# Altium PCB PCB1.PcbDoc
Units mm, origin at the board's own origin, x right, y up, seen from the top; angles counter-clockwise.
Board outline 35.2 x 15.75 mm, 4 copper layers (Top Layer, Layer 1, Layer 2, Bottom Layer), stack 0.603 mm thick; 36 components, 33 nets, 157 pads, 182 vias.
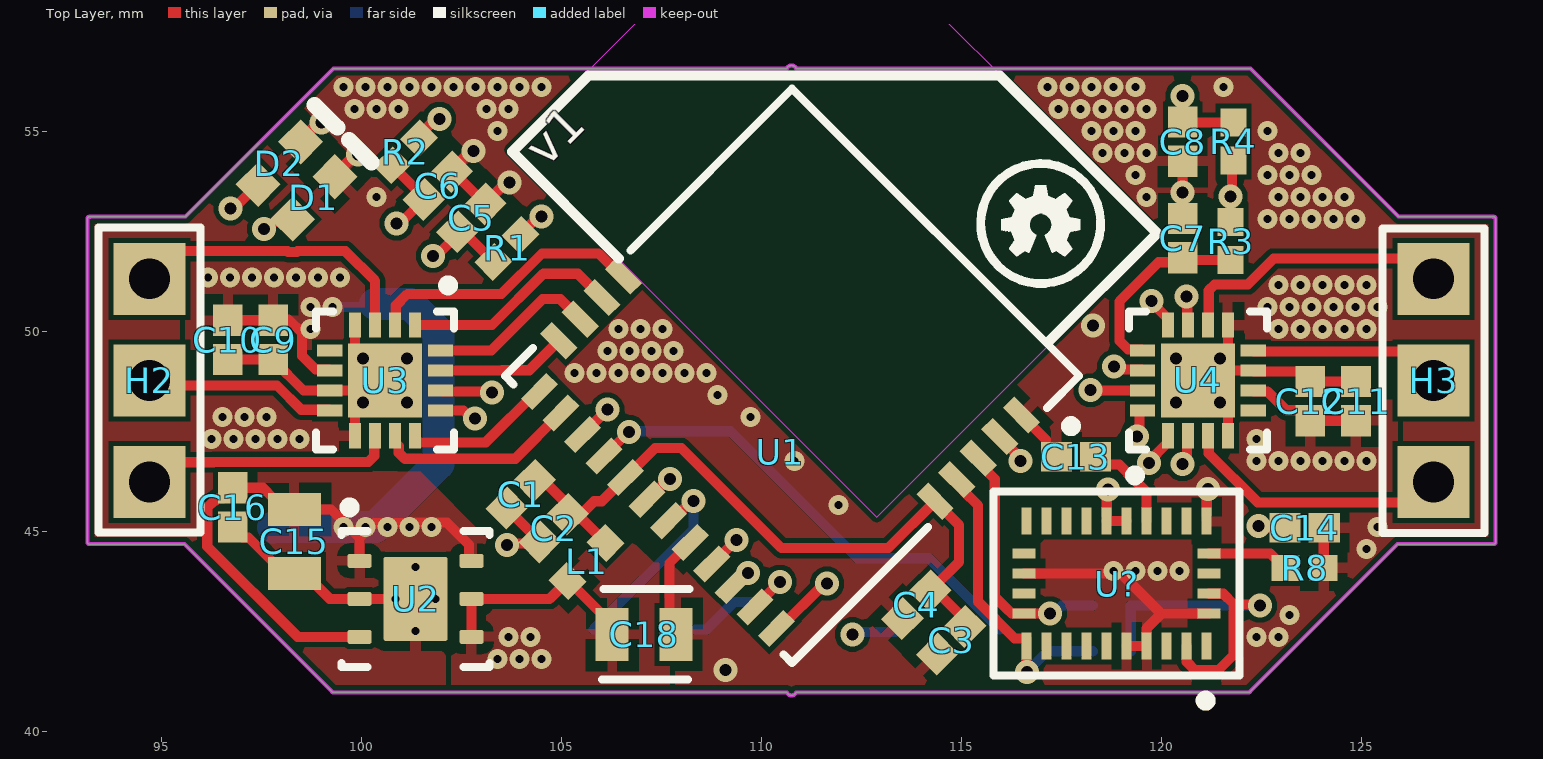
[diagram p0: Top Layer view]
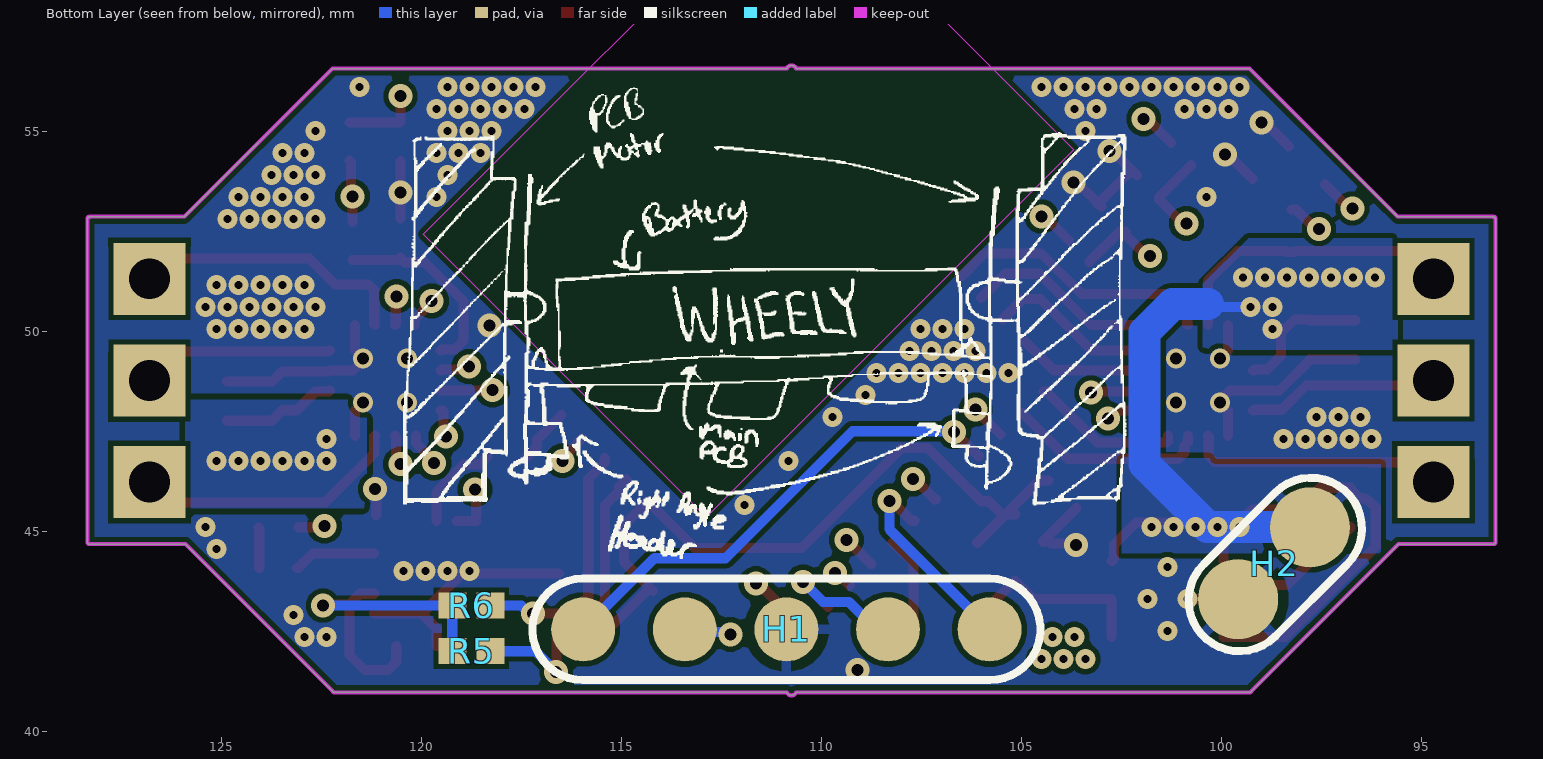
[diagram p1: Bottom Layer view, seen from below]
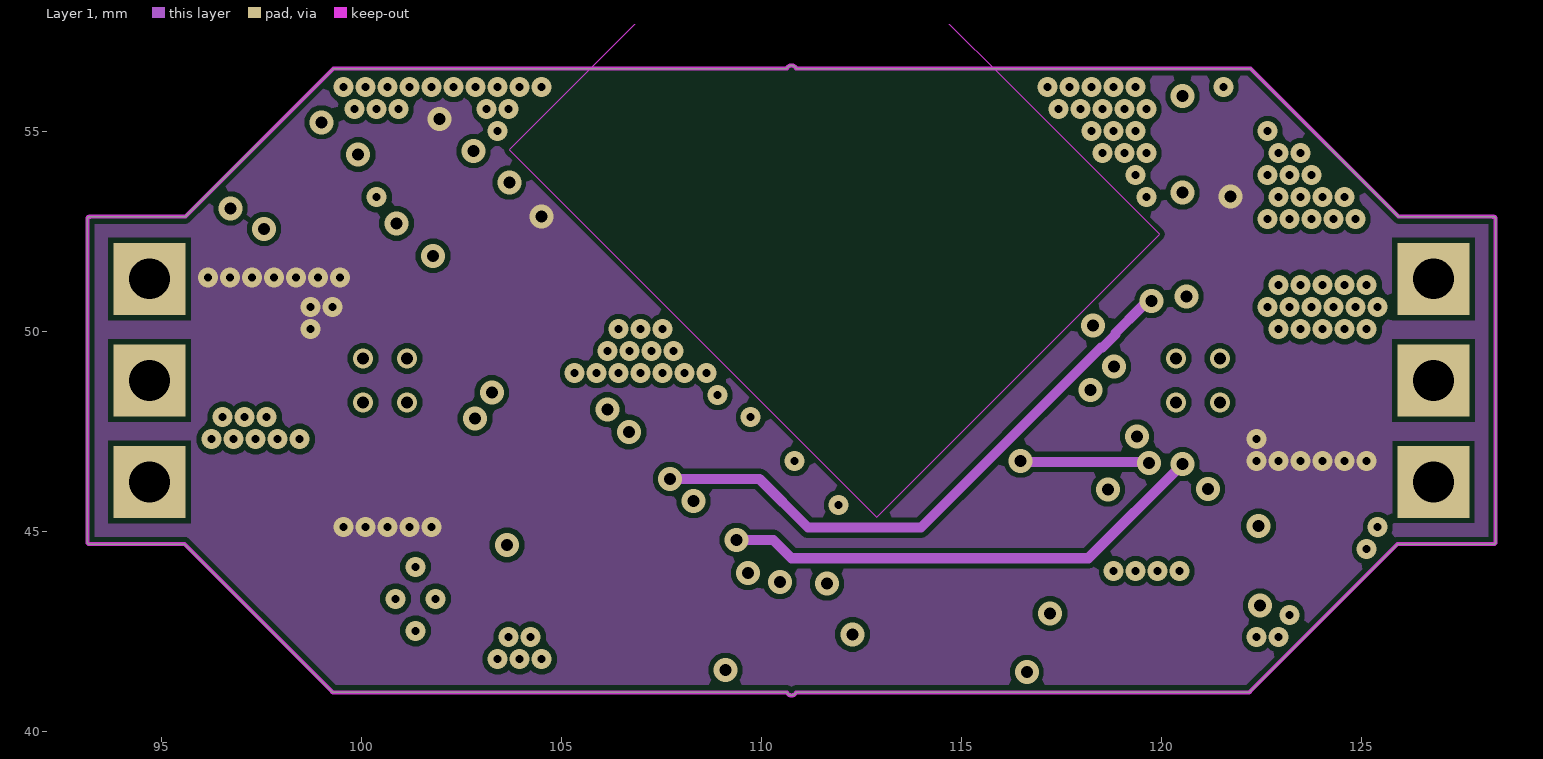
[diagram p2: Layer 1]
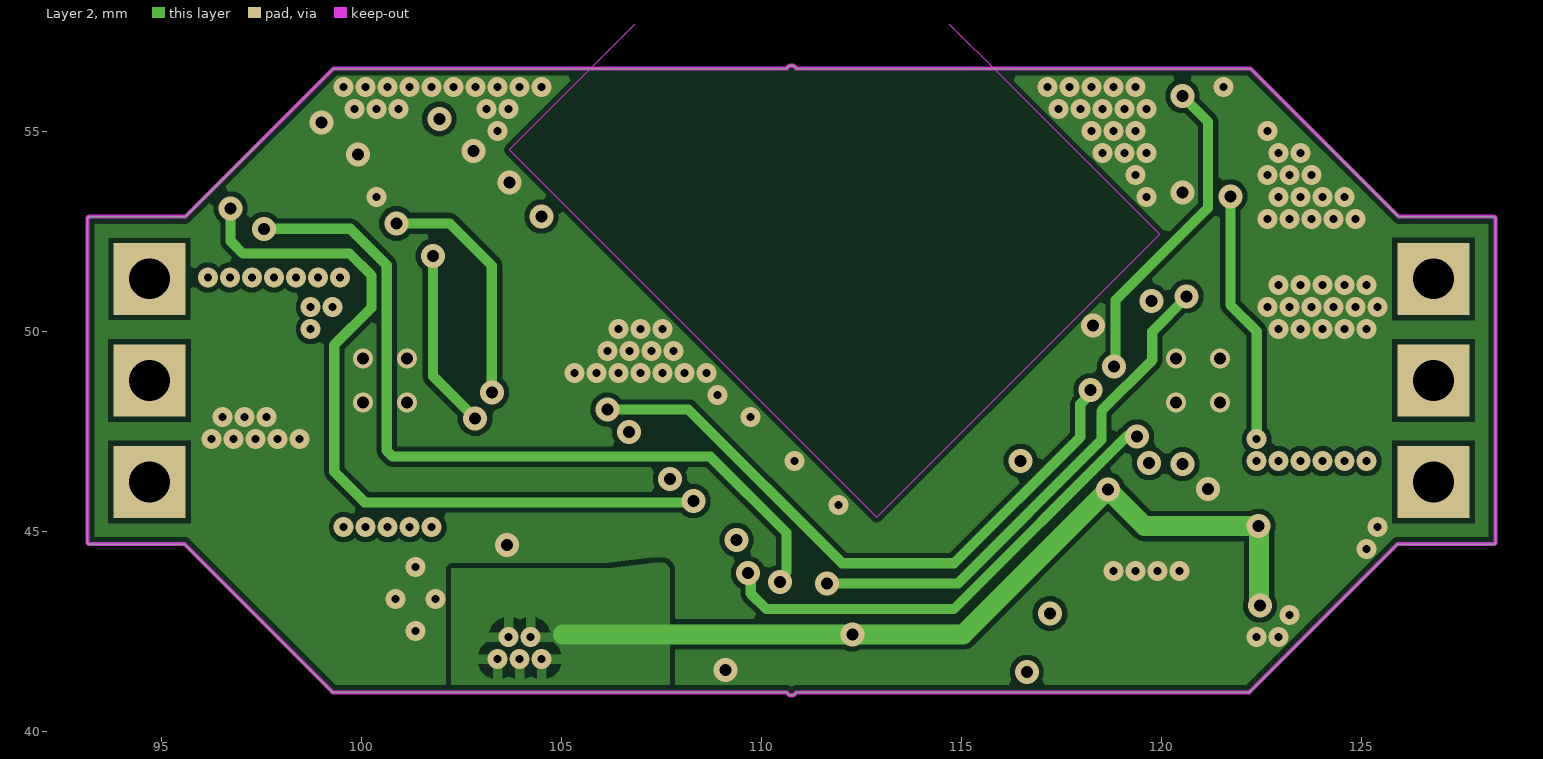
[diagram p3: Layer 2]

## Layer stack, top to bottom
Top Solder: solder mask 0.0102, Solder Resist, Dk 3.5
Top Layer: signal copper 0.0356
Dielectric 1: prepreg 0.0711, PP-006, Dk 4.1
Layer 1: signal copper 0.035
Dielectrc3: dielectric 0.32, FR-4, Dk 4.8
Layer 2: signal copper 0.035
Dielectric 2: prepreg 0.0711, PP-006, Dk 4.1
Bottom Layer: signal copper 0.0356
Bottom Solder: solder mask 0.0102, Solder Resist, Dk 3.5

## Board outline
93.218,44.675 95.563,44.675 99.253,40.985 99.253,40.986 ccw(c99.289,41.021) 99.289,40.971 110.627,40.971 ccw(c110.744,41.021) 110.861,40.971 122.174,40.971 ccw(c122.174,41.021) 122.21,40.986 122.21,40.985 125.9,44.675 128.27,44.675 ccw(c128.27,44.726) 128.282,44.677 ccw(c128.295,44.726) 128.345,44.726 128.345,52.81 ccw(c128.295,52.81) 128.282,52.859 ccw(c128.27,52.81) 128.27,52.861 125.925,52.861 122.235,56.551 122.235,56.55 ccw(c122.199,56.515) 122.199,56.565 110.861,56.565 ccw(c110.744,56.515) 110.627,56.565 99.314,56.565 ccw(c99.314,56.515) 99.278,56.55 99.278,56.551 95.588,52.861 93.218,52.861 ccw(c93.218,52.81) 93.206,52.859 ccw(c93.193,52.81) 93.143,52.81 93.143,44.726 ccw(c93.193,44.726) 93.206,44.677 ccw(c93.218,44.726)

## Design rules (kind name [scope] priority, off if disabled: settings)
Clearance [All] p1: gap=0.13 ignorepadtopadclearanceinfootprint=FALSE
PolygonConnect [isvia vs InNet('VCC')] p1: connectstyle=Direct reliefconductorwidth=0.254 reliefentries=4 polygonreliefangle="90 Angle" airgapwidth=0.254
PolygonConnect PolygonConnect_3 [isvia vs InNet('GND')] p2: connectstyle=Direct reliefconductorwidth=0.254 reliefentries=4 polygonreliefangle="90 Angle" airgapwidth=0.254
PolygonConnect PolygonConnect_2 [All] p3: connectstyle=Relief reliefconductorwidth=0.254 reliefentries=4 polygonreliefangle="90 Angle" airgapwidth=0.254
RoutingVias [All] p1: holewidth=0.711 width=1.27 viastyle="Through Hole" minholewidth=0.3 minwidth=0.6 maxholewidth=0.711 maxwidth=1.27
SolderMaskExpansion [All] p1: expansion=0 istentingtop=FALSE
Width [All] p1: maxlimit=1 minlimit=0.13 preferedwidth=0.254
30 further rules are at their usual default settings.

## Components (designator, comment, footprint, x,y, rotation, side; value= is the part's Value field where it differs from the comment)
C1 "10nF" CAPC1005X56X25ML10T15 103.973,45.922 r45 top
C2 "100nF" CAPC1005X56X25ML10T15 104.798,45.077 r45 top
C3 "10nF" CAPC1005X56X25ML10T15 114.733,42.271 r45 top
C4 "100nF" CAPC1005X56X25ML10T15 113.862,43.16 r45 top
C5 "10nF" CAPC1005X56X25ML10T15 102.743,52.832 r225 top
C6 "10nF" CAPC1005X56X25ML10T15 101.904,53.641 r225 top
C7 "10nF" CAPC1005X56X25ML10T15 120.523,52.324 r270 top
C8 "10nF" CAPC1005X56X25ML10T15 120.523,54.737 r90 top
C9 "10nF" CAPC1005X56X25ML10T15 97.79,49.784 r90 top
C10 "100nF" CAPC1005X56X25ML10T15 96.647,49.784 r90 top
C11 "10nF" CAPC1005X56X25ML10T15 124.858,48.248 r270 top
C12 "100nF" CAPC1005X56X25ML10T15 123.715,48.248 r270 top
C13 "100nF" CAPC1005X56X25ML10T15 117.856,46.863 r180 top
C14 "100nF" CAPC1005X56X25ML10T15 123.571,45.085 r180 top
C15 "10uF" FP-CL21B106KOQNNNE-MFG 98.315,44.742 r90 top
C16 "10nF" CAPC1005X56X25ML10T15 96.774,45.593 r90 top
C18 "10uF" FP-CL21B106KOQNNNE-MFG 107.061,42.418 r180 top
D1 "HSMD-C190" AVAG-HSMX-C190_V 98.8,53.329 r45 top
D2 "HSMD-C190" AVAG-HSMX-C190_V 97.939,54.201 r45 top
H1 "H5P2.54" T5P2.54 115.951,42.545 r180 bottom
H2 "H2P2.54" T2P2.54 98.679,44.196 r315 bottom
H2 "H3P2.54" "H3P2.54 V" 95.09,64.094 r90 top
H3 "H3P2.54" "H3P2.54 V" 126.398,33.442 r270 top
L1 "BLM18AG331SN1D" MURA-BLM18-RF-H4-CHIP-2_V 105.622,44.232 r45 top
R1 "10k" RESC1005X40X25ML5T10 103.632,52.07 r45 top
R2 "10k" RESC1005X40X25ML5T10 101.092,54.483 r45 top
R3 "10k" RESC1005X40X25ML5T10 121.721,52.25 r90 top
R4 "10k" RESC1005X40X25ML5T10 121.793,54.737 r270 top
R5 "10k" RESC1005X40X25ML5T10 118.749,41.999 r0 bottom
R6 "10k" RESC1005X40X25ML5T10 118.749,43.142 r0 bottom
R8 "0" RESC1005X40X25ML5T10 123.573,44.082 r180 top
U1 "CYBLE-022001-00" FP-CYBLE-022001-00-MFG 110.759,48.883 r315 top
U2 "LP38693SD-3.3/NOPB" NGG0006A_V 101.346,43.307 r0 top
U3 "STSPIN230" QFN50P300X300X100_HS-17N 100.584,48.768 r270 top
U4 "STSPIN230" QFN50P300X300X100_HS-17N 120.904,48.768 r90 top
U? "BNO085" FP-BNO085-MFG 118.872,43.688 r270 top

## Footprints (in the part's own frame and the unit in brackets; to place one, negate y for a bottom-side part, rotate by r counter-clockwise, add the part's x,y. Pads: shape width x height; smd on the part's side, far side on the other; paste and mask are expansions set on the pad)
AVAG-HSMX-C190_V [mm] "SMD, 2-Leads, Body 1.6x0.8mm, Height 0.9mm"
  rect 0.8x0.8 smd: 1(-0.75,0) 2(0.75,0)
  silkscreen extent 1.65,-0.4 1.65,0.4, body extent -0.8,-0.4 0.8,0.4, height 0.9
CAPC1005X56X25ML10T15 [mm] "Chip Capacitor, 2-Leads, Body 1.00x0.50mm, IPC Low Density"
  rect 0.78x0.74 smd: 1(-0.49,0) 2(0.49,0)
  body extent -0.55,-0.3 0.55,0.3, height 0.56
FP-BNO085-MFG [mm]
  rect 0.675x0.25 smd paste+0 mask+0: 1(1.562,2.25) 6(-1.562,2.25) 7(-1.562,1.75) 8(-1.562,1.25) 9(-1.562,0.75) 10(-1.562,0.25) 11(-1.562,-0.25) 12(-1.562,-0.75) 13(-1.562,-1.25) 14(-1.562,-1.75) 15(-1.562,-2.25) 20(1.562,-2.25) 21(1.562,-1.75) 22(1.562,-1.25) 23(1.562,-0.75) 24(1.562,-0.25) 25(1.562,0.25) 26(1.562,0.75) 27(1.562,1.25) 28(1.562,1.75)
  rect 0.25x0.575 smd paste+0 mask+0: 2(0.75,2.312) 3(0.25,2.312) 4(-0.25,2.312) 5(-0.75,2.312) 16(-0.75,-2.312) 17(-0.25,-2.312) 18(0.25,-2.312) 19(0.75,-2.312)
  silkscreen extent -2.3,-3.08 3.05,3.08, body extent -2.45,-3.15 2.45,3.15, height 0.25
FP-CL21B106KOQNNNE-MFG [mm]
  rect 0.825x1.325 smd paste+0 mask+0: 1(-0.8,0) 2(0.8,0)
  body extent -1.31,-0.8 1.31,0.8, height 0.25
FP-CYBLE-022001-00-MFG [mm]
  rect 0.91x0.41 smd paste+0 mask+0: 1(4.745,3.36) 2(4.745,2.598) 3(4.745,1.836) 4(4.745,1.074) 5(4.745,0.312) 18(-4.745,-3.506) 19(-4.745,-2.744) 20(-4.745,-1.982) 21(-4.745,-1.22)
  rect 0.41x0.91 smd paste+0 mask+0: 6(4.19,-4.745) 7(3.428,-4.745) 8(2.666,-4.745) 9(1.904,-4.745) 10(1.142,-4.745) 11(0.38,-4.745) 12(-0.382,-4.745) 13(-1.144,-4.745) 14(-1.906,-4.745) 15(-2.668,-4.745) 16(-3.43,-4.745) 17(-4.192,-4.745)
  Keep-Out Layer region: -9,-1 4,-1 4,9 -9,9
  Keep-Out Layer region: -9,-1 4,-1 4,9 -9,9
  silkscreen extent -5.07,-5.07 5.94,5.07, body extent -5.3,-5.3 5.3,5.18, height 0.25
"H3P2.54 V" [mm]
  rect 1.8x1.8 hole 1.02: 1(-17.866,0.397) 2(-15.326,0.397) 3(-12.786,0.397)
  silkscreen extent -19.13,-0.87 -11.51,1.67
MURA-BLM18-RF-H4-CHIP-2_V [mm] "Chip Ferrite Bead, 2-Leads, Body 1.6x0.8mm, Height 0.95mm, Reflow"
  rect 0.65x0.7 smd: 1(-0.675,0) 2(0.675,0)
  body extent -0.8,-0.4 0.8,0.4, height 0.95
NGG0006A_V [mm] "SON, 6-Leads, Body 3x3 mm, Pitch 0.95mm, Full Paste, NSC Recommended"
  rrect29% 0.6x0.35 smd paste-0.175 mask+0.051: 1(-1.4,0.95) 2(-1.4,0) 3(-1.4,-0.95) 4(1.4,-0.95) 5(1.4,0) 6(1.4,0.95)
  rrect6% 1.6x2.1 smd paste-0.8 mask+0.051: 7(0,0)
  silkscreen extent -1.85,-1.7 1.85,2.41, body extent -1.55,-1.55 1.55,1.55, height 0.8
QFN50P300X300X100_HS-17N [mm] "QFN, 16-Leads, Body 3.00x3.00mm, Pitch 0.50mm, Thermal Pad 1.85x1.85mm, IPC Medium Density"
  rect 0.63x0.3 smd: 1(-1.385,0.75) 2(-1.385,0.25) 3(-1.385,-0.25) 4(-1.385,-0.75) 9(1.385,-0.75) 10(1.385,-0.25) 11(1.385,0.25) 12(1.385,0.75)
  rect 0.3x0.63 smd: 5(-0.75,-1.385) 6(-0.25,-1.385) 7(0.25,-1.385) 8(0.75,-1.385) 13(0.75,1.385) 14(0.25,1.385) 15(-0.25,1.385) 16(-0.75,1.385)
  rect 1.85x1.85 smd: 17(0,0)
  silkscreen extent -2.5,-1.72 1.72,1.73, body extent -1.58,-1.57 1.57,1.58, height 1
RESC1005X40X25ML5T10 [mm] "Chip Resistor, 2-Leads, Body 1.05x0.55mm, IPC Low Density"
  rect 0.7x0.65 smd: 1(-0.475,0) 2(0.475,0)
  body extent -0.53,-0.28 0.53,0.28, height 0.4
T2P2.54 [mm]
  round 2 smd: 1(-1.27,0) 2(1.27,0)
  silkscreen extent -2.54,-1.23 2.54,1.31
T5P2.54 [mm]
  round 1.6 smd paste-5: 1(0,0) 2(2.54,0) 3(5.08,0) 4(7.62,0) 5(10.16,0)
  silkscreen extent -1.27,-1.27 11.43,1.27

## Part data
C1 C3 C5 C6 C7 C8 C9 C11 C16: library part CMP-2008-02799-1, "0402YC103MAT2A", Manufacturer="AVX Interconnect / Elco", Part Number=0402YC103MAT2A
C2 C4 C13 C14: library part CMP-2008-02800-1, "100nF / 0402YC104KAT2A", Manufacturer="AVX Interconnect / Elco", Part Number=0402YC104KAT2A
C10 C12: library part CMP-2008-02800-1, "0402YC104KAT2A", Manufacturer="AVX Interconnect / Elco", Part Number=0402YC104KAT2A
C15 C18: library part CMP-2000-06106-2, "CAP CER 10UF 16V X7R 0805 - CL21B106KOQNNNE", Manufacturer="Samsung Electro-Mechanics America, Inc", Manufacturer Part Number=CL21B106KOQNNNE, Temperature="-55°C to +125°C", Temperature Characteristic=X7R, Temperature Coefficient=15%, Temperature Range High=+125°C, Temperature Range Low=-55°C, Tolerance=10%, Voltage Rating=16V, Automotive=No, Capacitance=10uF, Category=Cap, ComponentLink2Description=Datasheet, ComponentLink2URL=http://www.samsungsem.com/servlet/FileDownload?path=productsearch&sname=CL21B106KOQNNNE.pdf&oname=CL21B106KOQNNNE.pdf, Device Class L1="Passive Components", Device Class L2=Capacitors, Device Class L3="Ceramic Capacitors", Digikey Description="CAP CER 10UF 16V X7R 0805", Height=1.4mm, Ipc Land Pattern Name=CAPC200125X125, Lead Free=Yes, Material=Ceramic, Octopart=https://octopart.com/cl21b106koqnnne-samsung-19832289, Package=CL21B106KOQNNNE, RoHS=TRUE
D1 D2: library part CMP-007-00012-1, "LED Uni-Color Orange, 52 mW, 20 mA, -40 to 85 degC, 2-Pin SMD, RoHS, Tape and Reel", Case/Package=0603, Colour=Orange, Forward Current=20mA, Forward Voltage=2.2V, Manufacturer=Avago, Max Operating Temperature=85°C, Min Operating Temperature=-40°C, Package Description="2-Pin Surface Mount Device, Body 1.6 x 0.8 mm, Height 0.9 mm", Package Quantity=4000, Package Reference=HSMX-C190, Power=52mW, Datasheet URL=http://docs.avagotech.com/docs/AV02-0551EN, Datasheet Version=Mar-12, Illumination Colour=Orange, Lens Style=Diffused, Luminous Intensity=8mcd, Manufacturer URL=http://www.avagotech.com/, Mounting Technology=SM, Nominal Vf=2.2V, Packaging=TapeandReel, Pins=2, RoHS Compliant=True, Viewing Angle=170degrees
L1: library part CMP-0686-00430-2, "Chip Ferrite Bead for General Use, 330 Ohm, 500 mA, -55 to 125 degC, 1.6 x 0.8 x 0.95 mm SMD, Tape and Reel", DC Resistance="0.30 Ohm Max.", Manufacturer=Murata, Operating Temperature Range="-55 to 125 degC", Rated Current="500 mA", ComponentLink1Description="Manufacturer URL", ComponentLink1URL=http://www.murata.com/, ComponentLink2Description=Datasheet, ComponentLink2URL=http://www.murata.com/products/catalog/pdf/c31e.pdf, ComponentLink3Description="Package Specification", ComponentLink3URL=http://www.murata.com/products/catalog/pdf/c31e.pdf, DatasheetVersion=08/2013, Impedance (at 100 MHz)="330 Ohm +/- 25%", Mounting Technology="Surface Mount", PackageDescription="2-Pin Chip, Body 1.6 x 0.8 mm", PackageReference=BLM18_H950-2, Packing="Tape and Reel", PartNumber=BLM18AG331SN1D
R1 R2 R3 R4 R5 R6 R8: library part CMP-2002-07915-2, "Chip Resistor, 10 KOhm, +/- 5%, 0.063 W, -55 to 155 degC, 0402 (1005 Metric), RoHS, Tape and Reel - RC0402JR-0710KL", Case Code (Imperial)=0402, Case Code (Metric)=1005, Max Operating Temperature="155 degC", Min Operating Temperature="-55 degC", Package Quantity=10000, Power Rating="63 mW", Resistance="10 kohm", Tolerance=5%, Voltage Rating="50 V", Case\Package=0402, ComponentLink1Description="Manufacturer URL", ComponentLink1URL=http://www.yageo.com/, ComponentLink2Description=Datasheet, ComponentLink2URL=http://www.yageo.com/documents/recent/PYu-RC_Group_51_RoHS_L_04.pdf, DatasheetVersion="Rev. 4, 02/2016", Height="0.35 mm", Length="1 mm", Mount="Surface Mount", Mounting Technology="Surface Mount", PackageDescription="2-Pin Surface Mount Device, Body 1 x 0.5 mm", PackageReference=0402, Packaging="Tape and Reel", Pins=2, REACH SVHC="No SVHC", RoHSCompliant=true, Voltage Rating (DC)="50 V", Width="0.5 mm"
U1: library part CMP-2000-05093-2, "RX TXRX MOD BLUETOOTH CHIP SMD", Case/Package=Module, Current - Receiving=16.4mA, Current - Transmitting=15.6mA, Frequency=2.4GHz, Max Operating Temperature=85°C, Max Supply Voltage=5.5V, Min Operating Temperature=-40°C, Min Supply Voltage=1.8V, Data Rate=1Mbps, Interface=I2C, Lead Free="Lead Free", Memory Size=16KB, Mount="Surface Mount", Number of Pins=21, Packaging="Tape and Reel", REACH SVHC="No SVHC", Sensitivity=-91dBm
U2: library part CMP-0062-01530-4, "500mA Low Dropout CMOS Linear Regulators Stable with Ceramic Output Capacitors, 6-pin LLP, Pb-Free, 1000 Reel", Manufacturer="Texas Instruments", PackageTopMarking=ZXYTT*L130B, PowerWise=Y, ComponentLink1Description="Datasheet URL", ComponentLink1URL=http://www.ti.com/general/docs/lit/getliterature.tsp?genericPartNumber=LP38693&fileType=pdf, CompType="LDO IC", High-Reliability=Y, PackageDescription="LLP, Plastic, Dual, 3 x 3 x 0.8mm Body, 6 Lead, 0.95mm Pitch, No Pullback", PackageReference=NGG0006A, PartNumber=LP38693SD-3.3/NOPB, PinCount=6, RoHS=Y
U?: library part CMP-197298-000001-1, "IMU ACCEL/GYRO/MAG I2C 32BIT", Manufacturer="Hillcrest Laboratories, Inc.", Max Supply Voltage=3.6V, Min Supply Voltage=1.7V, Temperature="-40°C to +85°C", Temperature Range High=+85°C, Temperature Range Low=-40°C, Accel Range=8g, Automotive=No, Category=IC, ComponentLink2Description=Datasheet, ComponentLink2URL=https://www.hillcrestlabs.com/download/5a747b8d566d073a5d000536, Device Class L1=Sensors, Device Class L2="Motion Sensors", Device Class L3="Inertial Measurement Units (IMUs)", Digikey Description="IMU ACCEL/GYRO/MAG I2C 32BIT", Height=1.18mm, Lead Free=Yes, Manufacturer Part Number=BNO085, Octopart=https://octopart.com/bno085-hillcrest+laboratories-92813482, Package=BNO085, RoHS=TRUE, Sensor Output=I2C,SPI,UART, Sensor Type=Accelerometer,Gyroscope,Magnetometer

## Via types
v1: diameter 0.5, hole 0.2, Top Layer to Bottom Layer, tented both sides, 129 vias
v2: diameter 0.6, hole 0.3, Top Layer to Bottom Layer, tented both sides, 41 vias
v3: diameter 0.5, hole 0.3, Top Layer to Bottom Layer, tented bottom, 8 vias
v4: diameter 0.5, hole 0.2, Top Layer to Bottom Layer, tented bottom, 4 vias

## Nets (pads, with @x,y where several pads share a name; then routed paths per layer and width w, separated by ;. In a path a pad name is that pad's centre, name@x,y a point inside that pad or via, vN(x,y) a via of type N, cw(c..) or ccw(c..) an arc to the next point about the centre after c; other vN are vias at no path point)
+3.3V: C14.2 C18.2 H1.2 L1.1 R5.2 R6.2 U2.4 U2.5 U?.3 U?.10 U?.11 U?.28 | length 38.3
  Top Layer w0.254: U2.4 U2.5 104.697,43.307 L1.1 105.175,43.754 106.261,42.668 C18.2 ; U?.11 U?.10 ; U?.11@118.626,45.39 v2@118.626,46.01 ; U?.28 120.624,42.124 120.624,41.732 120.827,41.529 121.417,41.529 121.793,41.905 121.793,43.18 121.537,43.436 121.186,43.436 U?.3 ; 121.805,43.169 v2@122.425,43.169 ; v2@122.449,45.096 C14.2@123.069,45.096
  Layer 2 w0.254: v2(122.419,45.126) v2@122.437,45.109 ; v2@122.437,43.156 v2(122.455,43.139)
  Layer 2 w0.5: 105.029,42.418 v2(112.268,42.418) 115.034,42.418 v2(118.656,46.04) 119.57,45.126 v2(122.419,45.126) ; v2@122.437,43.156 v2@122.437,45.109
  Bottom Layer w0.254: v2(112.268,42.418) 112.331,42.481 113.347,42.481 H1.2 ; R5.2 R6.2 119.225,43.14 122.453,43.14 v2(122.455,43.139)
  other v1: 103.4,41.8 103.95,41.8 104.5,41.8 103.675,42.35 104.225,42.35
GND: C1.1 C2.1 C3.1 C4.1 C5.1 C6.1 C7.1 C8.1 C9.1 C10.1 C11.1 C12.1 C13.2 C14.1 C15.1 C16.1 C18.1 D1.2 D2.2 H1.3 H2.2@99.577,43.298 R8.1 U1.1 U1.10 U2.2 U2.7 U3.4 U3.7 U3.9 U3.17 U4.4 U4.7 U4.9 U4.17 U?.2 U?.6 U?.17 U?.25 U?.26 | length 36.4
  Top Layer w0.254: C10.1 C9.1 97.79,49.274 98.546,48.518 U3.7 99.786,48.518 100.034,48.27 v3(100.034,48.218) 99.834,48.018 U3.9 ; C16.1 96.774,45.083 97.017,44.84 97.167,44.84 98.351,43.656 98.851,43.656 99.2,43.307 v4(100.846,43.307) ; D2.2@98.312,54.62 v2@98.901,55.209 ; D1.2@99.223,53.81 v2@99.812,54.4 ; U3.4 99.834,49.518 v3(100.034,49.318) ; C6.1@102.11,53.898 102.699,54.487 v2@102.957,54.487 ; C6.1 102.281,53.987 C5.1@103.078,53.19 ; C5.1@103.002,53.114 C5.1@103.078,53.19 ; C5.1 C5.1@103.078,53.19 ; C1.1 104.451,44.751 C2.1 ; v2@103.67,44.693 C2.1@104.256,44.693 ; v2@103.849,53.703 103.591,53.703 C5.1@103.078,53.19 ; C18.1 107.696,42.583 107.696,44.204 U1.10 ; U1.1 117.103,47.291 117.103,47.106 117.346,46.863 C13.2 ; U?.17 118.99,43.938 119.99,42.938 ; U?.25 U?.26 119.622,42.57 119.99,42.938 ; v2(120.519,53.461) 120.521,53.463 120.521,54.245 C8.1 ; C7.1 v2@120.523,53.457 ; U?.6@121.127,45.404 v2@121.127,46.024 ; U?.2 119.99,42.938 ; v3(121.454,48.218) 121.654,48.018 U4.4 ; U4.9 121.654,49.518 v3(121.454,49.318) 121.454,49.266 121.702,49.018 U4.7 122.312,48.995 123.472,48.995 123.715,48.752 C12.1 C11.1 ; R8.1 124.048,45.072 C14.1
  other v1: 122.375,42.35 122.925,42.35 123.2,42.9 118.8,44 119.35,44 119.9,44 120.45,44 125.125,44.55 125.4,45.1 111.925,45.65 110.825,46.75 96.25,47.3 96.8,47.3 97.35,47.3 97.9,47.3 98.45,47.3 96.525,47.85 97.075,47.85 97.625,47.85 109.725,47.85 108.9,48.4 105.325,48.95 105.875,48.95 106.425,48.95 106.975,48.95 107.525,48.95 108.075,48.95 108.625,48.95 106.15,49.5 106.7,49.5 107.25,49.5 107.8,49.5 106.425,50.05 106.975,50.05 107.525,50.05 122.925,50.05 123.475,50.05 124.025,50.05 124.575,50.05 125.125,50.05 122.65,50.6 123.2,50.6 123.75,50.6 124.3,50.6 124.85,50.6 125.4,50.6 122.925,51.15 123.475,51.15 124.025,51.15 124.575,51.15 125.125,51.15 122.65,52.8 123.2,52.8 123.75,52.8 124.3,52.8 124.85,52.8 100.375,53.35 119.625,53.35 122.925,53.35 123.475,53.35 124.025,53.35 124.575,53.35 119.35,53.9 122.65,53.9 123.2,53.9 123.75,53.9 118.525,54.45 119.075,54.45 119.625,54.45 122.925,54.45 123.475,54.45 103.4,55 118.25,55 118.8,55 119.35,55 122.65,55 99.825,55.55 100.375,55.55 100.925,55.55 103.125,55.55 103.675,55.55 117.425,55.55 117.975,55.55 118.525,55.55 119.075,55.55 119.625,55.55 99.55,56.1 100.1,56.1 100.65,56.1 101.2,56.1 101.75,56.1 102.3,56.1 102.85,56.1 103.4,56.1 103.95,56.1 104.5,56.1 117.15,56.1 117.7,56.1 118.25,56.1 118.8,56.1 119.35,56.1 121.55,56.1
  other v2: 109.093,41.529 103.632,44.655 121.157,46.054 118.288,50.146 103.688,53.715 99.909,54.412 102.796,54.499 98.998,55.221
  other v3: 101.134,48.218 120.354,48.218 101.134,49.318 120.354,49.318
  other v4: 101.346,42.507 101.846,43.307 101.346,44.107
NetC1_2: C1.2 C2.2 C3.2 C4.2 L1.2 U1.5 U1.13 | length 17.9
  Top Layer w0.254: C1.2 104.54,46.268 C2.2@105.385,45.423 ; C2.2 C2.2@105.385,45.423 ; L1.2 C2.2@105.385,45.423 ; C4.2 114.935,44.233 114.935,45.148 U1.5 113.164,44.577 110.49,44.577 107.988,47.079 107.338,47.079 U1.13 106.004,45.745 105.81,45.745 105.488,45.423 C2.2@105.385,45.423 ; C4.2@114.357,43.552 114.357,43.513 115.206,42.663 C3.2@115.228,42.663
NetC5_2: C5.2 R1.1 U3.13 | length 7.8
  Top Layer w0.254: v2@101.624,51.896 101.881,51.896 C5.2@102.471,52.486 ; U3.13 102.545,48.018 102.743,47.821 v2(102.836,47.821) ; C5.2 102.545,52.486 R1.1
  Layer 2 w0.254: v2(101.785,51.884) 101.785,48.872 v2(102.836,47.821)
NetC6_2: C6.2 R2.1 U3.14 | length 9.5
  Top Layer w0.254: v2@100.711,52.705 100.969,52.705 C6.2 101.558,53.345 R2.1 ; U3.14@102.002,48.519 102.026,48.495 103.217,48.495 v2(103.251,48.461)
  Layer 2 w0.254: v2(100.872,52.693) 102.201,52.693 103.251,51.643 v2(103.251,48.461)
NetC7_2: C7.2 R3.1 U4.13 | length 4.9
  Top Layer w0.254: U4.13 119.496,49.541 119.163,49.541 118.943,49.761 118.943,50.744 119.921,51.722 120.411,51.722 C7.2 120.582,51.775 R3.1
NetC8_2: C8.2 R4.1 U4.14 | length 10.7
  Top Layer w0.254: v2(118.809,49.112) 118.902,49.112 118.973,49.041 119.496,49.041 U4.14 ; v2@120.523,55.87 C8.2 120.538,55.212 R4.1
  Layer 2 w0.254: v2(118.809,49.112) 118.846,49.148 118.846,50.774 121.158,53.086 121.158,55.235 v2(120.519,55.874)
NetC13_1: C13.1 U?.9 | length 2.4
  Top Layer w0.254: C13.1 118.542,46.667 118.941,46.667 119.129,46.479 119.129,46.462 119.622,45.969 U?.9
NetD1_1: D1.1 H1.4 U1.7 | length 24.6
  Top Layer w0.254: v2(97.56,52.558) 97.642,52.558 98.122,53.037 D1.1@98.246,53.037 ; U1.7 v2(110.451,43.727)
  Layer 2 w0.254: v2(97.56,52.558) 99.715,52.558 100.627,51.646 100.627,47.012 100.776,46.863 108.712,46.863 110.617,44.958 110.617,43.986 110.451,43.82 v2(110.451,43.727)
  Bottom Layer w0.254: H1.4 108.628,42.545 109.315,43.232 109.956,43.232 v2(110.451,43.727)
NetD2_1: D2.1 H1.5 U1.11 | length 25.2
  Top Layer w0.254: v2@96.82,53.082 D2.1 ; U1.11 107.739,45.259 108.23,45.749 v2(108.296,45.749)
  Layer 2 w0.254: v2(96.723,53.07) 96.723,52.248 97.028,51.943 99.695,51.943 100.243,51.395 100.243,50.586 99.314,49.657 99.314,46.482 100.076,45.72 108.267,45.72 v2(108.296,45.749)
  Bottom Layer w0.254: H1.5 108.296,45.05 v2(108.296,45.749)
NetH1_1: H1.1 U1.14 | length 12.2
  Top Layer w0.254: U1.14 106.066,46.875 106.671,47.48 v2(106.68,47.48)
  Bottom Layer w0.254: v2(106.68,47.48) 106.698,47.498 109.22,47.498 112.395,44.323 114.173,44.323 H1.1
NetH2_1: H2.1@94.693,46.228 U3.10 | length 6.4
  Top Layer w0.254: H2.1@94.693,46.228 95.185,46.72 96.288,46.72 96.298,46.73 100.162,46.73 100.311,46.879 100.311,47.36 U3.10
NetH2_2: H2.2@94.693,48.768 U3.8 | length 4.8
  Top Layer w0.254: H2.2@94.693,48.768 94.82,48.641 97.88,48.641 98.484,48.037 99.18,48.037 U3.8
NetH2_3: H2.3 U3.3 | length 7.4
  Top Layer w0.254: H2.3 95.386,52.001 98.138,52.001 98.163,51.976 98.376,51.976 98.401,52.001 99.59,52.001 100.334,51.257 U3.3
NetH3_1: H3.1 U4.10 | length 7
  Top Layer w0.254: U4.10 121.177,50.176 121.177,51.019 121.326,51.168 122.152,51.168 122.8,51.816 126.287,51.816 H3.1
NetH3_2: H3.2 U4.8 | length 4.8
  Top Layer w0.254: U4.8 122.312,49.495 126.068,49.495 H3.2
NetH3_3: H3.3 U4.3 | length 6.8
  Top Layer w0.254: U4.3 121.177,47.36 121.177,46.941 122.398,45.72 126.287,45.72 H3.3
NetR5_1: R5.1 U1.4 U?.20 | length 7.6
  Top Layer w0.254: U1.4 115.051,46.11 115.051,46 115.41,45.641 115.41,43.231 116.321,42.32 116.62,42.32 116.622,42.318 U?.20 v2@116.622,41.482
  Bottom Layer w0.254: v2(116.626,41.478) 117.146,41.999 R5.1
NetR6_1: R6.1 U1.3 U?.19 | length 6.3
  Top Layer w0.254: U1.3 115.413,46.715 115.824,46.304 115.824,43.36 116.137,43.047 116.244,42.94 116.558,42.94 U?.19 v2@117.203,42.938
  Layer 2 w0.254: v2(117.207,42.942) v2@117.3,42.942
  Bottom Layer w0.254: v2@117.3,42.942 117.5,43.142 R6.1
NetR8_2: R8.2 U?.5 | length 2.1
  Top Layer w0.254: U?.5 122.717,44.438 123.073,44.082 R8.2
NetU1_2: U1.2 U4.1 | length 4.8
  Top Layer w0.254: U1.2@115.981,47.316 v2@116.472,46.825 ; v2(119.686,46.704) 119.686,46.75 120.131,47.195 U4.1@120.131,47.39
  Layer 1 w0.254: v2(116.472,46.759) 116.499,46.731 119.658,46.731 v2(119.686,46.704)
NetU1_6: U1.6 U4.11 | length 15.3
  Top Layer w0.254: U1.6 110.438,42.565 111.562,43.688 v2(111.633,43.688) ; v2(120.62,50.872) 120.637,50.855 120.637,50.17 U4.11
  Layer 2 w0.254: v2(111.633,43.688) 114.9,43.688 118.491,47.279 118.491,48.006 119.761,49.276 119.761,49.987 120.62,50.846 v2(120.62,50.872)
NetU1_8: U1.8 U4.16 | length 13.4
  Top Layer w0.254: U1.8 109.598,43.951 v2(109.658,43.951) ; v2(119.38,47.371) 119.446,47.437 119.446,47.995 119.469,48.018 U4.16
  Layer 2 w0.254: v2(109.658,43.951) 109.724,43.885 109.724,43.438 110.109,43.053 114.808,43.053 119.126,47.371 v2(119.38,47.371)
NetU1_9: U1.9 U4.2 | length 13.9
  Top Layer w0.254: U1.9 108.762,44.181 109.361,44.78 v2(109.372,44.78) ; v2(120.517,46.676) 120.517,46.769 120.631,46.883 120.631,47.36 U4.2
  Layer 1 w0.254: v2(109.372,44.78) 110.287,44.78 110.745,44.322 118.164,44.322 v2(120.517,46.676)
NetU1_12: U1.12 U4.12 | length 16.5
  Top Layer w0.254: U1.12 107.164,45.798 107.672,46.306 v2(107.702,46.306) ; v2(119.742,50.755) 119.742,50.73 120.154,50.318 U4.12
  Layer 1 w0.254: v2(107.702,46.306) 109.939,46.306 111.155,45.09 113.981,45.09 118.48,49.589 118.518,49.589 118.845,49.915 118.845,49.954 119.473,50.582 119.475,50.582 119.648,50.755 v2(119.742,50.755)
NetU1_15: U1.15 U4.15 | length 18.2
  Top Layer w0.254: U1.15 v2(106.141,48.037) ; v2(118.22,48.523) 118.229,48.514 U4.15@119.519,48.514
  Layer 2 w0.254: v2(106.141,48.037) 108.17,48.037 112.012,44.196 114.808,44.196 117.962,47.35 117.962,48.172 118.22,48.429 v2(118.22,48.523)
NetU1_16: U1.16 U3.11 | length 5
  Top Layer w0.254: U3.11 100.834,47.218 100.927,47.125 100.927,46.962 101.078,46.811 103.837,46.811 U1.16
NetU1_17: U1.17 U3.12 | length 3.8
  Top Layer w0.254: U3.12 101.334,47.242 101.357,47.219 103.099,47.219 104.372,48.492 U1.17
NetU1_18: U1.18 U3.15 | length 3.3
  Top Layer w0.254: U3.15 103.501,49.018 103.505,49.022 104.188,49.022 U1.18
NetU1_19: U1.19 U3.16 | length 4.2
  Top Layer w0.254: U3.16 103.239,49.518 104.521,50.8 104.962,50.8 U1.19
NetU1_20: U1.20 U3.1 | length 5.4
  Top Layer w0.254: U3.1 103.258,50.153 104.54,51.435 105.404,51.435 U1.20
NetU1_21: U1.21 U3.2 | length 7
  Top Layer w0.254: U3.2 100.849,50.168 100.849,50.634 101.142,50.927 103.489,50.927 104.505,51.943 105.921,51.943 106.489,51.375 U1.21
VCC: C9.2 C10.2 C11.2 C12.2 C15.2 C16.2 H2.1@97.781,45.094 R1.2 R2.2 R3.2 R4.2 U2.1 U2.3 U2.6 U3.6 U4.6 | length 41.6
  Top Layer w0.254: C10.2 C9.2 97.808,50.292 98.171,50.292 98.509,49.954 98.509,49.379 98.848,49.041 99.176,49.041 U3.6 ; C15.2@97.78,45.827 98.065,45.542 99.232,45.542 99.946,44.828 ; C15.2@97.78,45.828 97.525,46.083 C16.2 96.774,46.063 96.531,45.82 96.402,45.82 96.332,45.75 96.298,45.75 96.139,45.591 96.139,44.615 98.397,42.357 U2.3 ; U2.1 99.946,44.828 ; R2.2@101.252,54.704 v2@101.842,55.294 ; U2.6 102.727,44.257 102.679,44.305 102.679,44.664 102.131,45.212 100.33,45.212 99.946,44.828 ; R1.2@103.808,52.265 104.397,52.854 v2@104.655,52.854 ; v2(121.717,53.372) 121.755,53.41 121.755,54.224 R4.2 ; R3.2 v2@121.721,53.368 ; U4.6 122.312,48.495 122.64,48.495 123.115,48.021 123.472,48.021 123.715,47.778 C12.2 C11.2
  Layer 2 w0.254: v2(121.717,53.372) 121.717,50.651 122.375,49.993 v1(122.375,47.3)
  Bottom Layer w0.254: v1(99.275,50.6) 100.257,50.6 100.33,50.673
  Bottom Layer w0.8: H2.1@97.781,45.094 97.791,45.104 100.339,45.104 101.914,46.679 101.914,49.978 101.219,50.673 100.33,50.673
  other v1: 99.55,45.1 100.1,45.1 100.65,45.1 101.2,45.1 101.75,45.1 122.375,46.75 122.925,46.75 123.475,46.75 124.025,46.75 124.575,46.75 125.125,46.75 98.725,50.05 98.725,50.6 96.152,51.338 96.702,51.338 97.252,51.338 97.802,51.338 98.352,51.338 98.902,51.338 99.452,51.338
  other v2: 104.494,52.866 101.938,55.306
pads on no net: U3.5 U4.5 U?.1 U?.4 U?.7 U?.8 U?.12 U?.13 U?.14 U?.15 U?.16 U?.18 U?.21 U?.22 U?.23 U?.24 U?.27

## Polygon pours and split planes (outlines as drawn)
GND on Top Layer "GND_L01_P015" (solid, pour order 15): 102.235,43.18 102.235,41.021 99.187,41.021 98.044,42.164 98.044,42.291 100.203,42.291 100.203,43.307
VCC on Top Layer "VCC_L01_P012" (solid, pour order 12): 96.012,46.609 95.885,46.482 95.885,45.593 96.647,45.593 98.679,43.561 103.632,43.561 103.632,44.323 101.473,46.482
+3.3V on Top Layer "+3.3V_L01_P011" (solid, pour order 11): 102.235,44.069 102.235,41.021 107.696,41.021 107.696,44.204 107.307,44.204 106.299,45.212 105.156,44.069
VCC on Top Layer "VCC_L01_P009" (solid, pour order 9): 121.357,48.288 121.357,45.565 125.9,45.568 125.9,48.288
GND on Top Layer "GND_L01_P007" (solid, pour order 7): 121.357,52.098 121.357,49.375 128.285,49.379 128.285,52.028 128.215,52.098
GND on Top Layer "GND_L01_P005" (solid, pour order 5): 93.218,49.53 93.218,46.807 100.146,46.811 100.146,49.46 100.076,49.53
VCC on Top Layer "VCC_L01_P003" (solid, pour order 3): 95.588,49.53 100.457,49.53 100.457,51.181 99.695,51.943 95.588,51.943
GND on Top Layer "GND_L01_P000" (solid, pour order 0): 93.218,52.832 93.218,44.704 95.504,44.704 99.187,41.021 122.174,41.021 125.857,44.704 128.27,44.704 128.27,52.832 125.857,52.832 122.174,56.515 99.314,56.515 95.631,52.832
GND on Bottom Layer "GND_L04_P014" (solid, pour order 14): 102.235,43.18 102.235,41.021 99.187,41.021 98.044,42.164 98.044,42.291 100.203,42.291 100.203,43.307
VCC on Bottom Layer "VCC_L04_P013" (solid, pour order 13): 96.012,46.736 96.012,44.45 102.489,44.45 102.489,46.863
VCC on Bottom Layer "VCC_L04_P008" (solid, pour order 8): 121.357,48.288 121.357,45.565 125.9,45.568 125.9,48.288
GND on Bottom Layer "GND_L04_P006" (solid, pour order 6): 121.357,52.098 121.357,49.375 128.285,49.379 128.285,52.028 128.215,52.098
GND on Bottom Layer "GND_L04_P004" (solid, pour order 4): 93.218,49.53 93.218,46.807 100.146,46.811 100.146,49.46 100.076,49.53
VCC on Bottom Layer "VCC_L04_P002" (solid, pour order 2): 95.588,49.53 100.457,49.53 100.457,51.181 99.314,52.324 95.588,52.324
GND on Bottom Layer "GND_L04_P017" (solid, pour order 17): 93.218,52.832 93.218,44.704 95.504,44.704 99.187,41.021 122.174,41.021 125.857,44.704 128.27,44.704 128.27,52.832 125.857,52.832 122.174,56.515 99.314,56.515 95.631,52.832
+3.3V on Layer 2 "+3.3V_L03_P010" (solid, pour order 10): 102.235,44.069 102.235,41.021 107.696,41.021 107.696,44.204 107.307,44.204 106.172,44.069 105.156,44.069
GND on Layer 2 "GND_L03_P001" (solid, remove dead copper, pour order 1): 93.218,52.832 93.218,44.704 95.504,44.704 99.187,41.021 122.174,41.021 125.857,44.704 128.27,44.704 128.27,52.832 125.857,52.832 122.174,56.515 99.314,56.515 95.631,52.832
VCC on Layer 1 "VCC_L02_P016" (solid, pour order 16): 93.218,52.832 93.218,44.704 95.504,44.704 99.187,41.021 122.174,41.021 125.857,44.704 128.27,44.704 128.27,52.832 125.857,52.832 122.174,56.515 99.314,56.515 95.631,52.832

## Keep-outs
Keep-Out Layer:
  lines w0.1: 99.253,40.986 ccw(c99.289,41.021) 99.289,40.971 110.627,40.971 ccw(c110.744,41.021) 110.861,40.971 122.174,40.971 ccw(c122.174,41.021) 122.21,40.986 ; 99.253,40.986 99.253,40.985 ; 99.253,40.985 95.563,44.675 93.218,44.675 cw(c93.218,44.726) 93.206,44.677 cw(c93.193,44.726) 93.143,44.726 93.143,52.81 cw(c93.193,52.81) 93.206,52.859 cw(c93.218,52.81) 93.218,52.861 95.588,52.861 99.278,56.551 ; 99.278,56.55 cw(c99.314,56.515) 99.314,56.565 110.627,56.565 cw(c110.744,56.515) 110.861,56.565 122.199,56.565 cw(c122.199,56.515) 122.235,56.55 ; 99.278,56.55 99.278,56.551 ; 122.21,40.985 125.9,44.675 128.27,44.675 ccw(c128.27,44.726) 128.282,44.677 ccw(c128.295,44.726) 128.345,44.726 128.345,52.81 ccw(c128.295,52.81) 128.282,52.859 ccw(c128.27,52.81) 128.27,52.861 125.925,52.861 122.235,56.551 ; 122.21,40.985 122.21,40.986 ; 122.235,56.551 122.235,56.55

## Silkscreen, mask and mechanical layers (free items; w line width, h text height)
Top Overlay:
  drawing of 7 lines, arcs and shapes, not listed
  text "v1" at 104.809,53.854 h1.5 r45
Bottom Overlay:
  drawing of 38 lines, arcs and shapes, not listed
Mechanical 1:
  lines w0.1: 93.193,44.726 93.193,48.768 93.193,52.81 ; 93.218,44.726 95.584,44.726 99.289,41.021 110.744,41.021 122.174,41.021 125.879,44.726 128.27,44.726 ; 93.218,52.81 95.609,52.81 99.314,56.515 110.744,56.515 122.199,56.515 125.904,52.81 128.27,52.81 ; 128.295,44.726 128.295,48.768 128.295,52.81

## Text inside footprints (layer, text, board x,y; h text height)
L1: Mechanical 6 "Land Pattern Adapted for Reflow Soldering" at 104.491,43.949 h0.05 r45